# Altium PCB hex-inverter.PcbDoc
Units mil, origin at the board's own origin, x right, y up, seen from the top; angles counter-clockwise.
Board outline 3900 x 3895 mil, 2 copper layers (Top Layer, Bottom Layer), stack 61.756 mil thick; 48 components, 33 nets, 153 pads, 16 vias.
Unrouted connection lines stored in the file: 1.
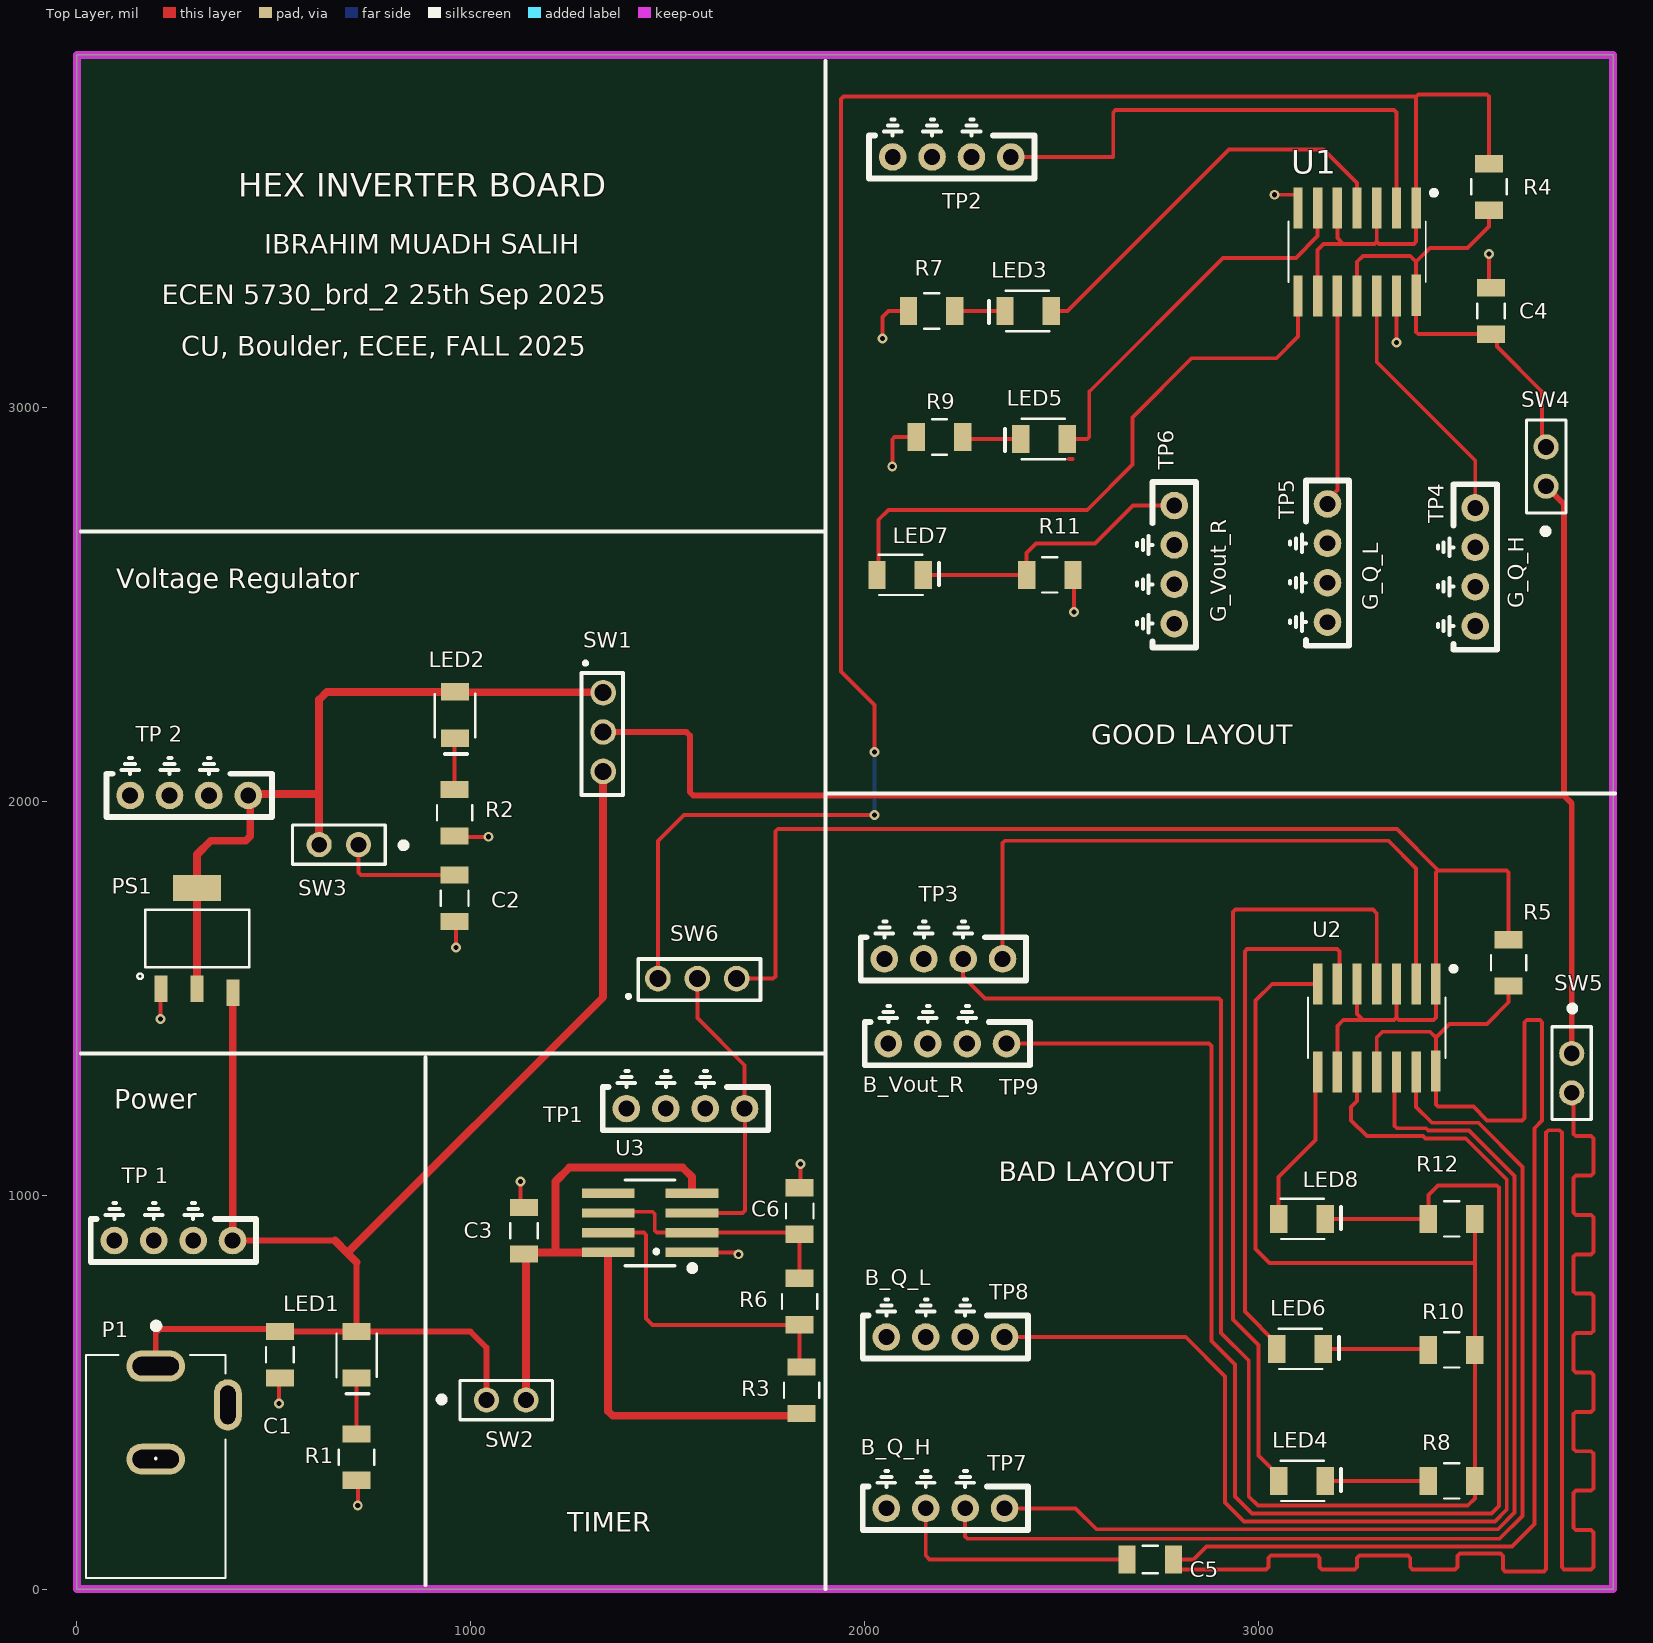
[diagram p0: Top Layer view]
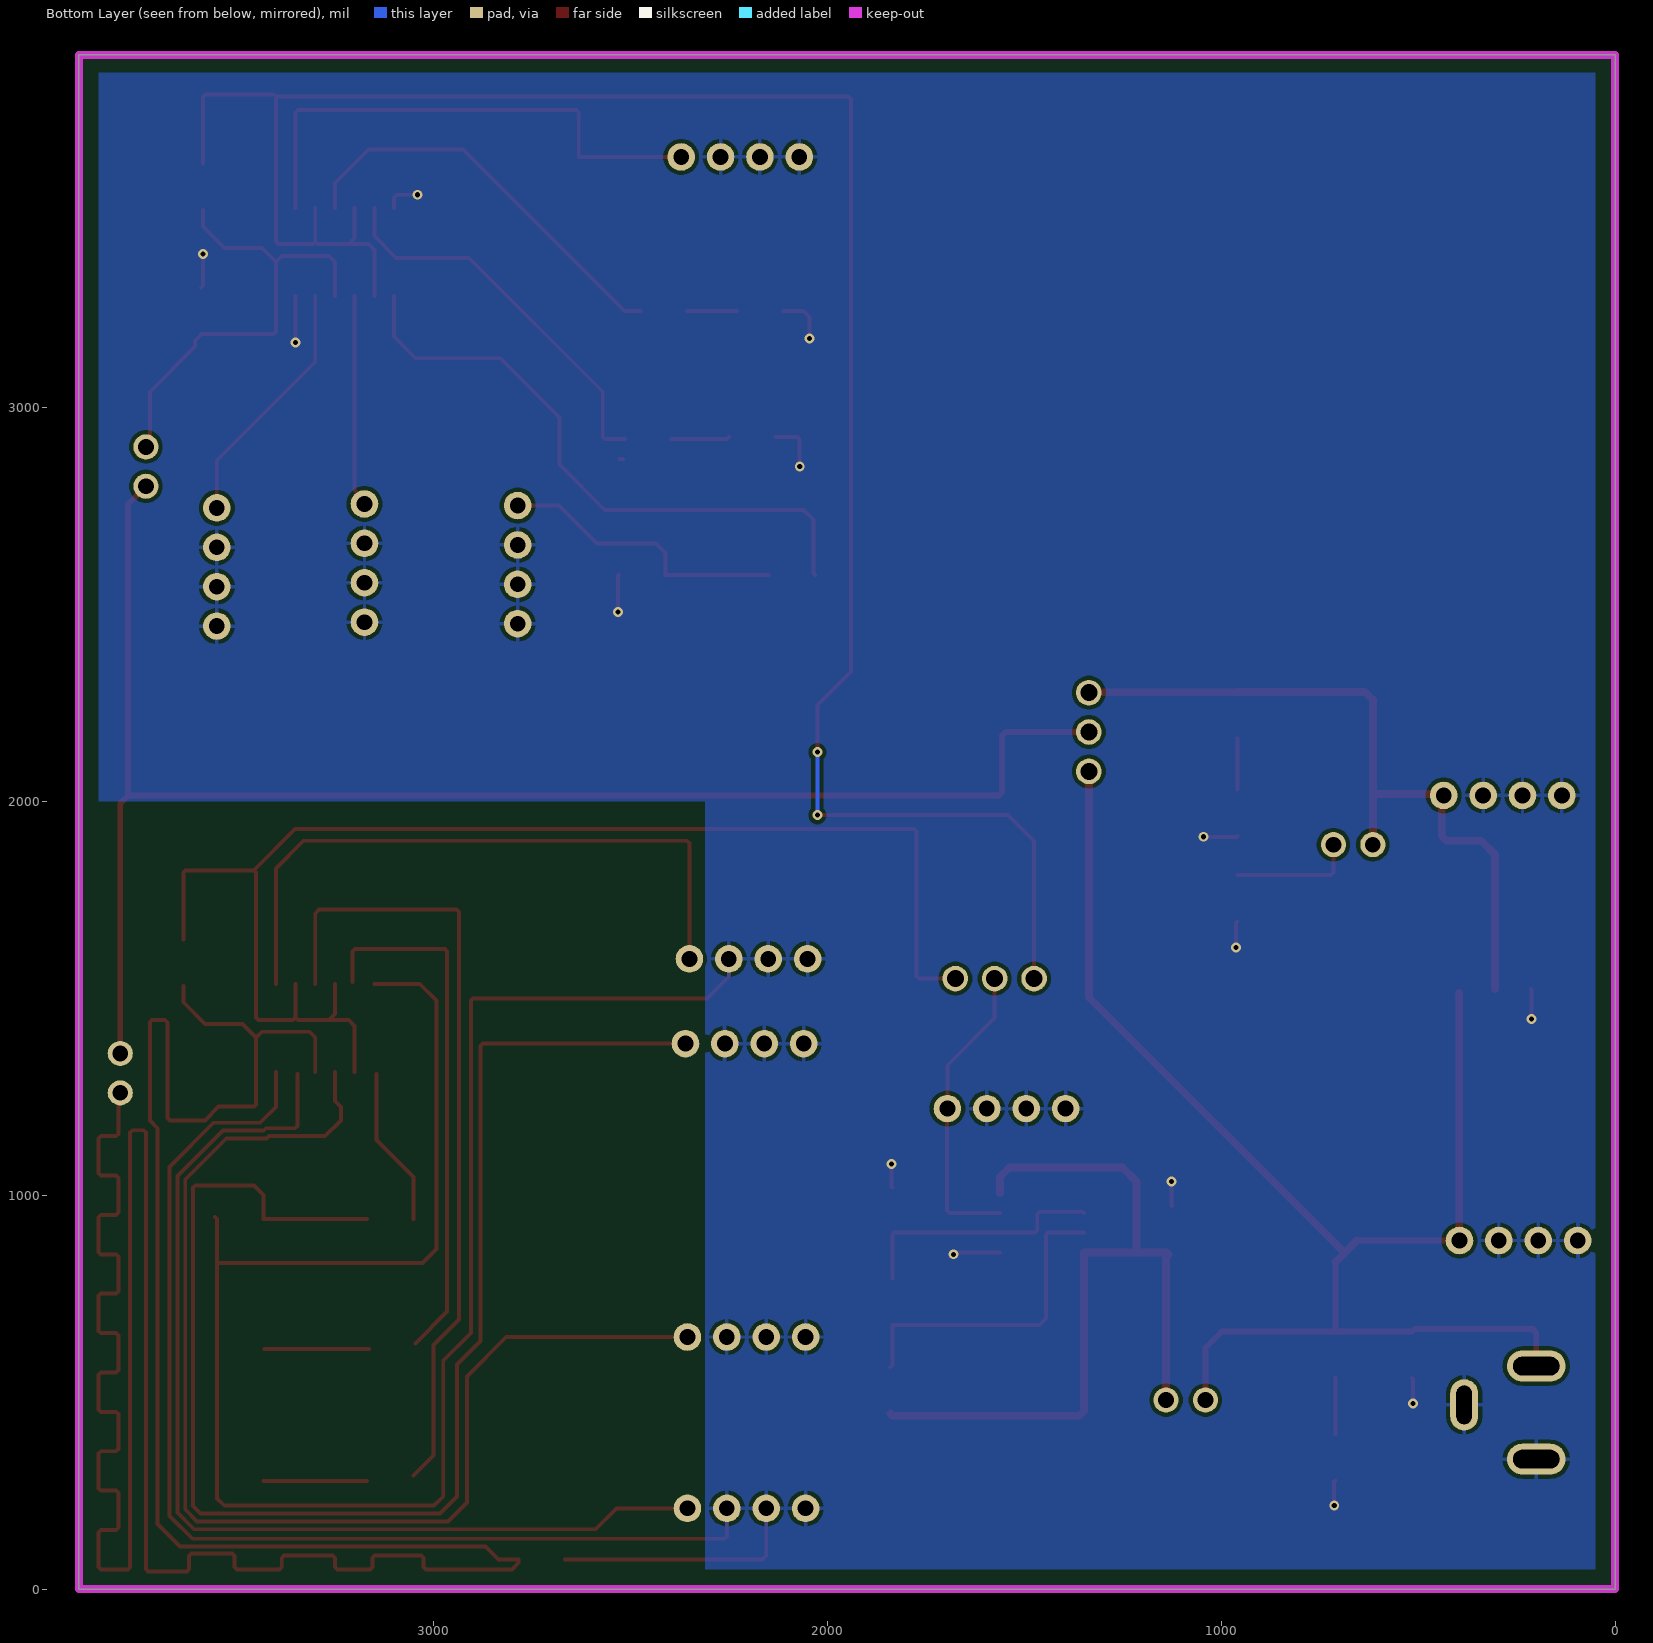
[diagram p1: Bottom Layer view, seen from below]
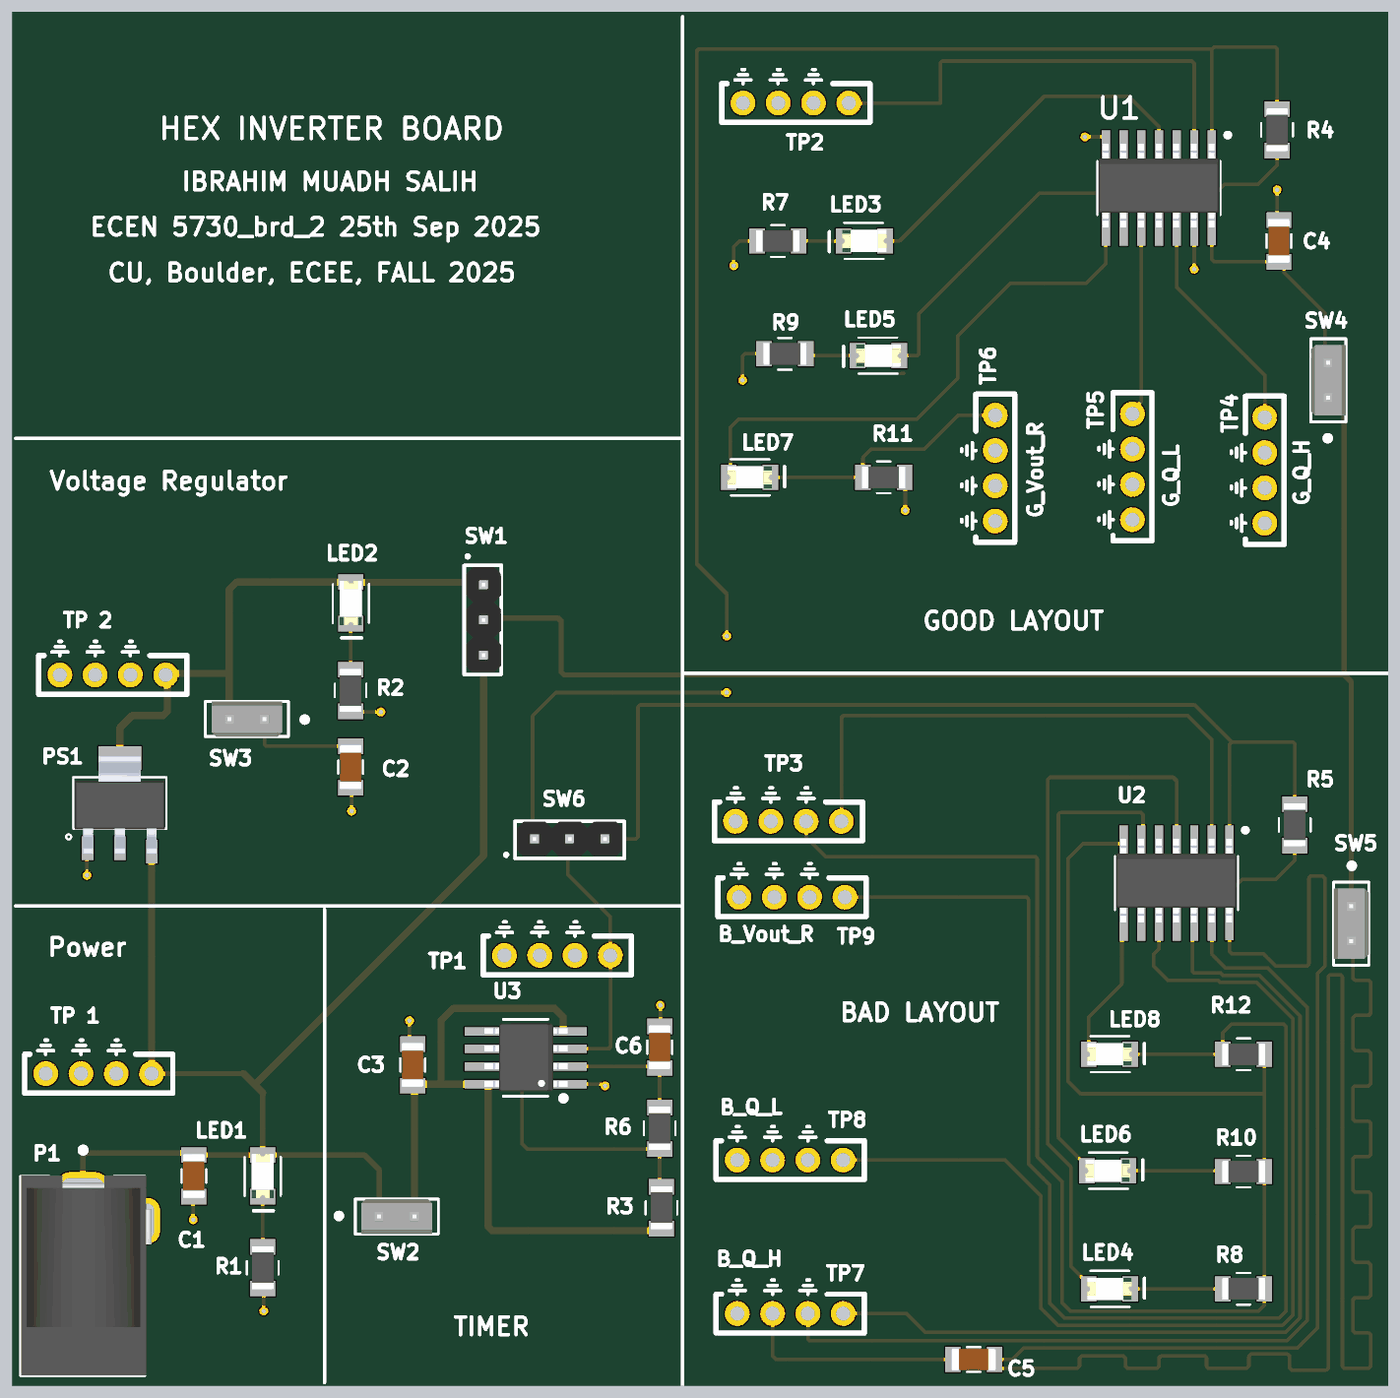
[diagram p2: 3D render of the assembled board from above, using the file's embedded part models]

## Layer stack, top to bottom
Top Solder: solder mask 1, SM-001, Dk 4
Top Layer: signal copper 1.378
Dielectric 1: core 59, Core-043, Dk 4.3
Bottom Layer: signal copper 1.378
Bottom Solder: solder mask 1, SM-001, Dk 4

## Board outline
0,0 3900,0 3900,3895 0,3895

## Design rules (kind name [scope] priority, off if disabled: settings)
Clearance [All] p1: gap=10 ignorepadtopadclearanceinfootprint=FALSE
PlaneConnect [All] p1: pad.planeconnectstyle=Relief pad.reliefexpansion=20 pad.reliefentries=4 pad.reliefconductorwidth=10 pad.reliefairgap=10 via.planeconnectstyle=Direct via.reliefexpansion=20 via.reliefentries=4 via.reliefconductorwidth=10 via.reliefairgap=10
PolygonConnect [All] p1: thpad.connectstyle=Relief thpad.reliefconductorwidth=10 thpad.reliefentries=4 thpad.polygonreliefangle="90 Angle" thpad.airgapwidth=10 smdpad.connectstyle=Relief smdpad.reliefconductorwidth=10 smdpad.reliefentries=4 smdpad.polygonreliefangle="90 Angle" smdpad.airgapwidth=10 via.connectstyle=Direct via.reliefconductorwidth=10 via.reliefentries=4 via.polygonreliefangle="90 Angle" via.airgapwidth=10
RoutingVias [All] p1: holewidth=28 width=50 viastyle="Through Hole" minholewidth=28 minwidth=50 maxholewidth=28 maxwidth=50
SolderMaskExpansion [All] p1: expansion=4 istentingtop=FALSE
SupplyNets "Schematic Supply Nets_6" [InNet('GND')] p1: voltage=0.000
SupplyNets "Schematic Supply Nets_5" [InNet('HEX_B_power')] p2: voltage=0.000
SupplyNets "Schematic Supply Nets_4" [InNet('+5V')] p3: voltage=0.000
SupplyNets "Schematic Supply Nets_3" [InNet('HEX_G_power')] p4: voltage=0.000
SupplyNets "Schematic Supply Nets_2" [InNet('+5V/3.3V_source')] p5: voltage=0.000
SupplyNets "Schematic Supply Nets_1" [InNet('+3.3V_source')] p6: voltage=0.000
SupplyNets "Schematic Supply Nets" [InNet('+5V_Timer')] p7: voltage=0.000
Width "Schematic Width Constraint_3" [InNet('+3.3V_source')] p1: maxlimit=20 minlimit=15 preferedwidth=20 minimp=50.000000 maximp=50.000000 favimp=50.000000
Width "Schematic Width Constraint_2" [InNet('+5V/3.3V_source')] p2: maxlimit=20 minlimit=15 preferedwidth=20 minimp=50.000000 maximp=50.000000 favimp=50.000000
Width "Schematic Width Constraint_1" [InNet('+5V')] p3: maxlimit=20 minlimit=15 preferedwidth=20 minimp=50.000000 maximp=50.000000 favimp=50.000000
Width "Schematic Width Constraint" [InNet('+5V_Timer')] p4: maxlimit=20 minlimit=15 preferedwidth=20 minimp=50.000000 maximp=50.000000 favimp=50.000000
Width [All] p5: maxlimit=10 minlimit=10 preferedwidth=10
29 further rules are at their usual default settings.

## Components (designator, comment, footprint, x,y, rotation, side; value= is the part's Value field where it differs from the comment)
C1 "22uF" 1206_Passive_Capacitor 515,595 r90 top
C2 "22uF" 1206_Passive_Capacitor 959,1754 r90 top
C3 "22uF" 1206_Passive_Capacitor 1135,910 r270 top
C4 "22uF" 1206_Passive_Capacitor 3590,3245 r270 top
C5 "22uF" 1206_Passive_Capacitor 2725,75 r0 top
C6 "1uF" 1206_Passive_Capacitor 1835,960 r270 top
LED1 "Red" LED_1206 710,595 r270 top
LED2 "Red" LED_1206 960,2219 r270 top
LED3 "Red" LED_1206 2415,3245 r180 top
LED4 "Red" LED_1206 3110,275 r0 top
LED5 "Red" LED_1206 2455,2920 r180 top
LED6 "Red" LED_1206 3105,610 r0 top
LED7 "Red" LED_1206 2090,2575 r0 top
LED8 "Red" LED_1206 3110,940 r0 top
P1 "Power Jack" Power_Jack 200,566.22 r270 top value="CONN PWR JACK 2X5.5MM SOLDER"
PS1 "AMS1117-3.3" LDO 305,1652 r0 top value="IC REG LINEAR 3.3V 800MA SOT223"
R1 "1k" 1206_Passive_Resitor 710,335 r270 top value="1K Ohm"
R2 "1k" 1206_Passive_Resitor 959,1971 r90 top value="1K Ohm"
R3 "1k" 1206_Passive_Resitor 1840,505 r270 top value="1K Ohm"
R4 "10k" 1206_Passive_Resitor 3585,3560 r270 top value=10KOhm
R5 "10k" 1206_Passive_Resitor 3635,1590 r270 top value=10KOhm
R6 "1k" 1206_Passive_Resitor 1835,730 r270 top value="1K Ohm"
R7 "47 Ohms" 1206_Passive_Resitor 2170,3245 r180 top value=47Ohm
R8 "47 Ohms" 1206_Passive_Resitor 3490,275 r0 top value=47Ohm
R9 "47 Ohms" 1206_Passive_Resitor 2190,2925 r180 top value=47Ohm
R10 "47 Ohms" 1206_Passive_Resitor 3490,607.5 r0 top value=47Ohm
R11 "47 Ohms" 1206_Passive_Resitor 2470,2575 r0 top value=47Ohm
R12 "47 Ohms" 1206_Passive_Resitor 3490,940 r0 top value=47Ohm
SW1 "PREC003SAAN-RC" 3_PIN_100mil 1336,2276 r270 top value="CONN HEADER VERT 3POS 2.54MM"
SW2 "SW_2Pin_100mil_Switch" 2Pin-Header-Conn 1040,480 r0 top
SW3 "SW_2Pin_100mil_Switch" 2Pin-Header-Conn 715,1890 r180 top
SW4 "SW_2Pin_100mil_Switch" 2Pin-Header-Conn 3730,2800 r90 top
SW5 "SW_2Pin_100mil_Switch" 2Pin-Header-Conn 3795,1360 r270 top
SW6 "PREC003SAAN-RC" 3_PIN_100mil 1475,1550 r0 top value="CONN HEADER VERT 3POS 2.54MM"
TP1 "10x Probe TP" TP10x_Probe 1545,1220 r180 top
TP2 "10x Probe TP" TP10x_Probe 2221,3636 r180 top
TP3 "10x Probe TP" TP10x_Probe 2200,1600 r180 top
TP4 "10x Probe TP" TP10x_Probe 3550,2595 r270 top
TP5 "10x Probe TP" TP10x_Probe 3175,2605 r270 top
TP6 "10x Probe TP" TP10x_Probe 2786,2601 r270 top
TP7 "10x Probe TP" TP10x_Probe 2205,205 r180 top
TP8 "10x Probe TP" TP10x_Probe 2205,640 r180 top
TP9 "10x Probe TP" TP10x_Probe 2210,1385 r180 top
"TP 1" "10x Probe TP" TP10x_Probe 245,885 r180 top
"TP 2" "10x Probe TP" TP10x_Probe 285,2015 r180 top
U1 "SN74AHC14DR" HEX_74AC14 3250,3395 r270 top
U2 "SN74AHC14DR" HEX_74AC14 3300,1425 r270 top
U3 "LMC555CMX/NOPB" TS555IDTTR 1455,930 r180 top

## Footprints (in the part's own frame and the unit in brackets; to place one, negate y for a bottom-side part, rotate by r counter-clockwise, add the part's x,y. Pads: shape width x height; smd on the part's side, far side on the other; paste and mask are expansions set on the pad)
2Pin-Header-Conn [mm]
  round 1.62 hole 1.02: 1(0,0) 2(2.54,0)
  silkscreen extent -3.02,-1.27 4.26,1.26, body extent -1.27,-1.27 3.81,1.27, height 8.13
3_PIN_100mil [mm]
  round 1.65 hole 1.1: 1(0,0) 2(2.54,0) 3(5.08,0)
  silkscreen extent -2,-1.4 6.6,1.27, body extent -1.14,-1.27 6.48,1.27, height 8.38
1206_Passive_Capacitor [mil]
  rect 44x71 smd: 1(-59,0) 2(59,0)
  silkscreen extent -19,-35 19,35, body extent -63,-31 63,32, height 50
1206_Passive_Resitor [mil]
  rect 44x71 smd: 1(-59,0) 2(59,0)
  silkscreen extent -19,-45 19,45, body extent -61,-31 61,31, height 26
HEX_74AC14 [mm]
  rect 2.65x0.6 smd: 1(-2.836,3.81) 2(-2.836,2.54) 3(-2.836,1.27) 4(-2.836,0) 5(-2.836,-1.27) 6(-2.836,-2.54) 7(-2.836,-3.81) 8(2.836,-3.81) 9(2.836,-2.54) 10(2.836,-1.27) 11(2.836,0) 12(2.836,1.27) 13(2.836,2.54) 14(2.794,3.81)
  silkscreen extent -3.94,-4.43 1.95,5.08, body extent -3.18,-4.35 2.82,4.3, height 1.75
LDO [mm]
  rect 0.838x1.7 smd: 1(-2.311,-3.25) 2(0,-3.25) 3(2.311,-3.5)
  rect 3.099x1.7 smd: 4(0,3.25)
  silkscreen extent -3.86,-2.62 3.35,1.85, body extent -3.25,-3.65 3.25,3.35, height 1.85
LED_1206 [mil]
  rect 44x71 smd: 1(-59,0) 2(59,0)
  silkscreen extent -54,-51 99,51, body extent -63,-31 63,31, height 28
Power_Jack [mm]
  oval 2x3.8 hole 1.2 slot 3 at 90 deg: 1(0,0) 2(6,0)
  oval 3.3x1.8 hole 1 slot 2.5 at 0 deg: 3(2.5,4.65)
  silkscreen extent -2.79,-4.5 13.68,4.5, body extent -0.76,-4.45 13.64,4.95, height 11.49
TP10x_Probe [mil] "Small Probs footprint"
  round 70 hole 40: 1(-150,0) 2(-50,0) 2(50,0) 2(150,0)
  silkscreen extent -210,-95 210,55
TS555IDTTR [mm] "IC OSC Single Timer 2.7MHz 8SOIC"
  rect 3.4x0.6 smd: 1(-2.7,1.905) 2(-2.7,0.635) 3(-2.7,-0.635) 4(-2.7,-1.905) 5(2.7,-1.905) 6(2.7,-0.635) 7(2.7,0.635) 8(2.7,1.905)
  silkscreen extent -2.85,-2.77 1.6,3.05, body extent -3.03,-2.48 2.96,2.43, height 1.75

## Part data
C1 C2 C3 C4 C5: library part C_22uF_1206, "22uF ±10% 25V X5R 1206 Multilayer Ceramic Capacitors MLCC - SMD/SMT RoHS", LCSC Part#=C12891, MFR Part #=CL31A226KAHNNNE, Datasheet=https://datasheet.lcsc.com/lcsc/1811031514_Samsung-Electro-Mechanics-CL31A226KAHNNNE_C12891.pdf, Type=basic
C6: library part C_1uF_1206, "MULTILAYER CERAMIC CAPACITORS MLCC - SMD/SMT 1UF 50V 1206 ROHS", LCSC Part#=C1848, MFR Part #=CL31B105KBHNNNE, Digikey Link=https://www.digikey.com/product-detail/en/C1206C105M4RACTU/399-8150-1-ND/3471873/?itemSeq=304982366, Type=Basic
LED1 LED2 LED3 LED4 LED5 LED6 LED7 LED8: library part LED_RED_1206, "Red 621~631nm 1206 Light Emitting Diodes (LED) RoHS", LCSC Part#=C93133, MFR Part #=15-21/R6C-FQ1R1B/2T, Datasheet=https://datasheet.lcsc.com/szlcsc/1811151241_Everlight-Elec-15-21-R6C-FQ1R1B-2T_C93133.pdf, Type=Extended
P1: library part "P_Power Jack", "Power Barrel Connector Jack 2.10mm ID (0.083\"), 5.50mm OD (0.217\") Through Hole, Right Angle", LCSC Part#=C136744, MFR Part #=PJ-102A, Digikey Link=https://www.digikey.com/product-detail/en/PJ-102A/CP-102A-ND/275425/?itemSeq=304982367, Type=Extended
PS1: library part PS_AMS_LDO_3v3, "LOW DROPOUT REGULATORS(LDO) POSITIVE FIXED 1.3V @ 800MA 15V 3.3V 1A SOT-223 ROHS", LCSC Part#=C6186, MFR Part #=AMS1117-3.3, Type=Basic
R1 R2 R3 R6: library part R_1K_1206, "CHIP RESISTOR - SURFACE MOUNT 1KOHMS ±1% 1/4W 1206 ROHS", LCSC Part#=C4410, MFR Part #=RNCP1206FTD1K00CT, Digikey Link=https://www.digikey.com/product-detail/en/RNCP1206FTD1K00/RNCP1206FTD1K00CT-ND/2240675/?itemSeq=304982373, Type=Basic
R4 R5: library part R_10KOhm_1206, "10 kOhms ±5% 0.25W, 1/4W Chip Resistor 1206 (3216 Metric) Automotive AEC-Q200 Thick Film", LCSC Part#=C17902, MFR Part #=RMCF1206FT10K0, Digikey Link=https://www.digikey.com/en/products/detail/stackpole-electronics-inc/RMCF1206FT10K0/1759669, Type=Basic
R7 R8 R9 R10 R11 R12: library part R_47Ohm_1206, "47Ω ±5% 0.25W ±200ppm/℃ 1206 Chip Resistor - Surface Mount RoHS", LCSC Part#=C25384, MFR Part #=1206W4J0470T5E, Datasheet=https://datasheet.lcsc.com/lcsc/1811101020_UNI-ROYAL-Uniroyal-Elec-1206W4J0470T5E_C25384.pdf, Type=Extended
SW1 SW6: library part SW_3Pin_100mil_Switch, "Connector Header Through Hole 3 position 0.100\" (2.54mm)", LCSC Part#=C49257, Digikey Link=https://www.digikey.com/product-detail/en/PREC003SAAN-RC/S1012EC-03-ND/2774851/?itemSeq=304982371, MFR Part #=PREC003SAAN-RC, Type=Extended
SW2 SW3 SW4 SW5: "2Pin Header", LCSC Part#=C124375, Type=Extended
TP1 TP2 TP3 TP4 TP5 TP6 TP7 TP8 TP9 "TP 1" "TP 2": library part TP_10x_Probe, "Test Point 300 mil centers"
U1 U2: library part U_74AHC14, "Inverter IC 6 Channel Schmitt Trigger 14-SOIC", LCSC Part#=C6942, Datasheet=https://datasheet.lcsc.com/szlcsc/ON-Semicon-ON-74AC14SCX_C5482.pdf, MFR Part #=SN74AHC14DR, Type=Extended
U3: library part U_555_Fast, "555 Type, Timer/Oscillator _Single_ IC 3MHz 8-SO", LCSC Part#=C90760, Package=SOIC-8, Digikey Link=https://www.digikey.com/product-detail/en/texas-instruments/LMC555CMX-NOPB/LMC555CMX-NOPBCT-ND/1010550, MFR Part #=LMC555CMX/NOPB, Type=Extended

## Via types
v1: diameter 25, hole 13, Top Layer to Bottom Layer, 16 vias

## Nets (pads, with @x,y where several pads share a name; then routed paths per layer and width w, separated by ;. In a path a pad name is that pad's centre, name@x,y a point inside that pad or via, vN(x,y) a via of type N, cw(c..) or ccw(c..) an arc to the next point about the centre after c; other vN are vias at no path point)
+3.3V_source: "TP 2.1" LED2.1 PS1.2 PS1.4 SW1.1 SW3.2 | length 1869.6
  Top Layer w20: PS1.2 PS1.4 305,1865 340,1900 428.28,1900 440,1911.72 440,2010 435,2015 ; 444.5,2019.5 444.96,2019.04 615,2019.04 ; SW3.2 615,2019.04 ; SW1.1 1335,2277 961,2277 LED2.1 634.72,2278 615,2258.28 615,2019.04
+5V: "TP 1.1" C1.2 LED1.1 P1.1 PS1.3 SW1.3 SW2.1 | length 3716.2
  Top Layer w15: P1.1 200,651.21 208.79,660 509,660 C1.2 LED1.1 ; 395,885 655,885 ; 710,830 LED1.1 ; SW2.1 1040,612.91 998.91,654 LED1.1
  Top Layer w20: 395,885 395.5,885.5 PS1.3@395.5,1513.7 ; PS1.3@395.5,1513.95 PS1.3@395.5,1513.7 ; PS1.3 PS1.3@395.5,1513.7 ; 655,885 686.5,853.5 ; 710,830 686.5,853.5 ; SW1.3 1336,1503 686.5,853.5
+5V/3.3V_source: SW1.2 SW4.1 SW5.1 | length 4056.6
  Top Layer w15: SW1.2 1547.21,2176 1556,2167.21 1556,2023.79 1564.79,2015 3775,2015 ; SW4.1 3775,2755 3775,2015 ; SW5.1 3795,1995 3775,2015
+5V_Timer: C3.2 R3.2 SW2.2 U3.4 U3.8 | length 2083.1
  Top Layer w20: C3.2@1133.5,849.5 1140,843 SW2.2 ; C3.2 1139,855 1215,855 ; 1347.7,704 1348.7,705 ; U3.4 1561.3,1046.81 1538.11,1070 1250,1070 1215,1035 1215,855 ; R3.2 1834,440 1360.42,440 1348.7,451.72 1348.7,705 ; 1215,855 U3.8 1348.7,705
GND: "TP 1.2" "TP 2.2" C1.1 C2.1 C3.1 C4.1 C5.1 C6.1 P1.2 P1.3 PS1.1 R1.2 R2.1 R7.2 R8.2 R9.2 R10.2 R11.2 R12.2 TP1.2 TP2.2 TP3.2 TP4.2 TP5.2 TP6.2 TP7.2 TP8.2 TP9.2 U1.7 U1.13 U2.7 U2.13 U3.1 | length 9414.4
  Top Layer w10: v1(212,1447) 212,1522.05 PS1.1 ; v1(513,471) 513,534 C1.1 ; R1.2 713,273 v1(713,212) ; C2.1 962,1692 v1(962,1629) ; R2.1 961,1910 v1(1045,1910) ; C3.1@1125,973 1126,974 v1(1126,1035) ; U3.1 1670.94,855 1675.94,850 v1(1680,850) ; C6.1 1837,1021 v1(1837,1079) ; v1(2045,3175) 2045,3229.14 ; 2049.14,3233.28 2060.86,3245 R7.2 ; v1(2070,2850) 2070,2919.14 2075.86,2925 R9.2 ; TP7.2@2155,205 2155,85 2165,75 C5.1 ; TP3.2@2250,1600 2250,1555 2305,1500 2899.14,1500 2905,1494.14 2905,650 2975,580 2975,235 2998,212 3531,212 3549,230 R8.2 R10.2 3549,828 ; TP7.2@2255,205 2255,133.72 2260.86,127.86 3612.14,127.86 3670,185.72 3670,1072 3558,1184 3440,1184 3400,1224 U2.13 ; 2519,2869.5 2527,2869.5 ; R11.2 2531,2573 v1(2531,2481) ; v1(3040,3540) 3093.19,3540 3100,3533.19 U1.7 ; U2.7 3034.65,1536.65 2992,1494 2992,864 3028,828 3549,828 ; v1(3350,3165) U1.13 ; R12.2@3554,945 R12.2 3549,828 ; v1(3585,3390) 3585,3309 C4.1
HEX_B_1Y: TP3.1 U2.2 | length 1668.9
  Top Layer w10: TP3.1 2350,1894.14 2355.86,1900 3330,1900 3400,1830 U2.2
HEX_B_2Y: LED4.1 U2.4 | length 2028.6
  Top Layer w10: LED4.1@3051,288.5 3000,339.5 3000,620 2935,685 2935,1719.14 2940.86,1725 3290,1725 3300,1715 U2.4
HEX_B_3Y: LED6.1 U2.6 | length 1351.5
  Top Layer w10: LED6.1@3046,623.5 2965,704.5 2965,1619.14 2970.86,1625 3199.14,1625 3205,1619.14 U2.6@3205,1541.65
HEX_B_4Y: LED8.1 U2.8 | length 407.3
  Top Layer w10: LED8.1 3051,1046 3145,1140 U2.8@3145,1308.35
HEX_B_5Y: TP8.1 U2.10 | length 3093.3
  Top Layer w10: TP8.1 2815,640 2915,540 2915,220 2963,172 3599.72,172 3630,202.28 3630,1040 3526,1144 3423.43,1144 3417.43,1150 3275,1150 3235,1190 3235,1224 3250,1239 U2.10
HEX_B_6Y: TP7.1 U2.12 | length 2679
  Top Layer w10: TP7.1 2535,205 2588,152 3608,152 3650,194 3650,1048.28 3534.28,1164 3431.72,1164 3425.72,1170 3350.86,1170 3345,1175.86 U2.12@3345,1308.35
HEX_B_555: R5.1 SW6.3 U2.1 U2.3 U2.5 U2.9 | length 3489.6
  Top Layer w10: SW6.3 1767.71,1550 1773.56,1555.86 1773.56,1924.14 1779.42,1930 3350.86,1930 3455.86,1825 ; U2.9 3200,1430 3215,1445 3265,1445 ; U2.5 3250,1460 3265,1445 ; U2.3 3350,1450.86 ; R5.1 3635,1819.14 3629.14,1825 3455.86,1825 ; 3265,1445 3344.14,1445 3350,1450.86 ; 3350,1450.86 3355.86,1445 3444.14,1445 3450,1450.86 U2.1 3450,1819.14 3455.86,1825
HEX_B_power: C5.2 R5.2 SW5.2 U2.11 U2.14 | length 8624
  Top Layer w10: U2.11 3300,1400 3315,1415 3435,1415 3450,1400 ; R5.2 3635,1490 3580,1435 3485,1435 3450,1400 ; SW5.2 3800,1255 3800,1155.86 3805.86,1150 3844.14,1150 3850,1144.14 3850,1055.86 3844.14,1050 3805.86,1050 3800,1044.14 3800,955.86 3805.86,950 3844.14,950 3850,944.14 3850,855.86 3844.14,850 3805.86,850 3800,844.14 3800,755.86 3805.86,750 3844.14,750 3850,744.14 3850,655.86 3844.14,650 3805.86,650 3800,644.14 3800,555.86 3805.86,550 3844.14,550 3850,544.14 3850,455.86 3844.14,450 3805.86,450 3800,444.14 3800,355.86 3805.86,350 3844.14,350 3850,344.14 3850,255.86 3844.14,250 3805.86,250 3800,244.14 3800,155.86 3805.86,150 3844.14,150 3850,144.14 3850,55.86 3844.14,50 3775.86,50 3770,55.86 3770,1159.14 3764.14,1165 3735.86,1165 3730,1159.14 3730,50.86 3724.14,45 3625.86,45 3620,50.86 3620,84.14 3614.14,90 3510.86,90 3505,84.14 3505,55.86 3499.14,50 3390.86,50 3385,55.86 3385,79.14 3379.14,85 3255.86,85 3250,79.14 3250,55.86 3244.14,50 3160.86,50 3155,55.86 3155,79.14 3149.14,85 3030.86,85 3025,79.14 3025,55.86 3019.14,50 2801,50 2784,67 C5.2 2835,75 2867.86,107.86 3642.86,107.86 3700,165 3700,1170 3720,1190 3720,1439.14 3714.14,1445 3680.86,1445 3675,1439.14 3675,1195.86 3669.14,1190 3580.28,1190 3545.28,1225 3455.86,1225 3450,1230.86 3450,1400
HEX_G_1Y: TP2.1 U1.2 | length 1339.5
  Top Layer w10: TP2.1 2631,3636 2631,3749.14 2636.86,3755 3344.14,3755 3350,3749.14 U1.2
HEX_G_2Y: LED3.1 U1.4 | length 1044.4
  Top Layer w10: LED3.1 2515,3245 2925,3655 3165,3655 3250,3570 U1.4
HEX_G_3Y: LED5.1 U1.6 | length 988.3
  Top Layer w10: LED5.1 2565,2920 2570,2925 2570,3040 2910,3380 3095,3380 3150,3435 U1.6
HEX_G_4Y: LED7.1 U1.8 | length 1572.9
  Top Layer w10: LED7.1 2035,2579 2035,2715 2060,2740 2565,2740 2680,2855 2680,2975 2830,3125 3045,3125 3100,3180 U1.8
HEX_G_5Y: TP5.1 U1.10 | length 538.7
  Top Layer w10: TP5.1 3175,2765.86 3200,2790.86 U1.10
HEX_G_6Y: TP4.1 U1.12 | length 641.9
  Top Layer w10: U1.12 3300,3115 3550,2865 TP4.1
HEX_G_555: R4.1 SW6.1 U1.1 U1.3 U1.5 U1.9 | length 5534.4
  Top Layer w10: SW6.1 1475,1899.14 1540.86,1965 v1(2025,1965) ; v1(2025,2125) 2025,2245 1940,2330 1940,3783.28 1945.86,3789.14 3400,3789.14 ; U1.9 3150,3400 3165,3415 3215,3415 ; U1.5 3200,3430 3215,3415 ; U1.3 3300,3420.86 ; R4.1 3585,3789.14 3579.14,3795 3405.86,3795 3400,3789.14 ; 3215,3415 3294.14,3415 3300,3420.86 ; 3300,3420.86 3305.86,3415 3394.14,3415 3400,3420.86 U1.1 3400,3789.14
  Bottom Layer w10: v1(2025,1965) v1(2025,2125)
HEX_G_power: C4.2 R4.2 SW4.2 U1.11 U1.14 | length 1228.8
  Top Layer w10: U1.11 3250,3370 3265,3385 3385,3385 3400,3370 ; R4.2 3585,3460 3530,3405 3435,3405 3400,3370 ; C4.2 C4.2@3587,3186 ; SW4.2 3720,2910 3720,3040 3605.14,3154.86 3605.14,3169 3588.14,3186 C4.2@3587,3186 ; 3400,3370 U1.14 3400,3191.86 3405.86,3186 C4.2@3587,3186
NetC2_2: C2.2 SW3.1 | length 317.6
  Top Layer w10: SW3.1 715,1818.86 720.86,1813 C2.2
NetC6_2: C6.2 R6.1 U3.2 U3.6 | length 647.3
  Top Layer w10: U3.6 1351.7,958 1461.14,958 1467,952.14 1467,910.86 1472.86,905 U3.2 1831,905 C6.2 R6.1
NetLED1_2: LED1.2 R1.1 | length 142
  Top Layer w10: R1.1 LED1.2
NetLED2_2: LED2.2 R2.2 | length 130.4
  Top Layer w10: R2.2 959,2159 LED2.2
NetLED3_2: LED3.2 R7.1 | length 127
  Top Layer w10: R7.1 LED3.2
NetLED4_2: LED4.2 R8.1 | length 262
  Top Layer w10: LED4.2 R8.1
NetLED5_2: LED5.2 R9.1 | length 149.1
  Top Layer w10: R9.1 2254,2920 LED5.2
NetLED6_2: LED6.2 R10.1 | length 264.5
  Top Layer w10: LED6.2 R10.1@3428.5,610
NetLED7_2: LED7.2 R11.1 TP6.1 | length 742.7
  Top Layer w10: LED7.2 R11.1 2411,2631 2435,2655 2585,2655 2681,2751 TP6.1
NetLED8_2: LED8.2 R12.1 TP9.1 | length 3709.9
  Top Layer w10: TP9.1 2874.14,1385 2880,1379.14 2880,630 2940,570 2940,235 2983,192 3591.43,192 3610,210.57 3610,1019.14 3604.14,1025 3455,1025 3431,1001 R12.1 LED8.2
NetR3_1: R3.1 R6.2 U3.7 | length 816.6
  Top Layer w10: U3.7 1439.14,905 1445,899.14 1445,687 1461,671 R6.2 1835,569 R3.1
NetSW6_2: SW6.2 TP1.1 U3.3 | length 776.2
  Top Layer w10: U3.3 1690,955 1695.86,960.86 1695.86,1219.14 TP1.1 1695,1330 1575,1450 SW6.2
pads on no net: U3.5

## Polygon pours and split planes (outlines as drawn)
GND on Bottom Layer "GND_L02_P000" (solid, pour order 0): 50,3850 50,50 2310,50 2310,2000 3850,2000 3850,3850

## Keep-outs
Keep-Out Layer:
  the board outline again, w20

## Silkscreen, mask and mechanical layers (free items; w line width, h text height)
Top Overlay:
  lines w10: 10,1360 1895,1360 ; 10,2685 1900,2685 ; 885,10 885,1350 ; 1900,0 1900,3880 ; 1905,2020 3905,2020
  text "HEX INVERTER BOARD" at 410,3535 h60
  text "IBRAHIM MUADH SALIH" at 475,3390 h50
  text "ECEN 5730_brd_2 25th Sep 2025" at 215,3261.66 h50
  text "CU, Boulder, ECEE, FALL 2025" at 265,3131.66 h50
  text "Voltage Regulator" at 100,2541.66 h50
  text "G_Q_H" at 3673.34,2490 h40 r90
  text "G_Q_L" at 3303.34,2485 h40 r90
  text "G_Vout_R" at 2918.34,2455 h40 r90
  text "GOOD LAYOUT" at 2575,2145 h50
  text "B_Vout_R" at 1995,1261.66 h40
  text "Power" at 95,1220 h50
  text "BAD LAYOUT" at 2340,1035 h50
  text "B_Q_L" at 2000,771.66 h40
  text "B_Q_H" at 1990,341.66 h40
  text "TIMER" at 1245,145 h50